# Altium PCB shy-mirror-sensor-revA.PcbDoc
Units mil, origin at the board's own origin, x right, y up, seen from the top; angles counter-clockwise.
Board outline 370 x 485 mil, 2 copper layers (Top Layer, Bottom Layer); 2 components, 5 nets, 14 pads, 2 vias.
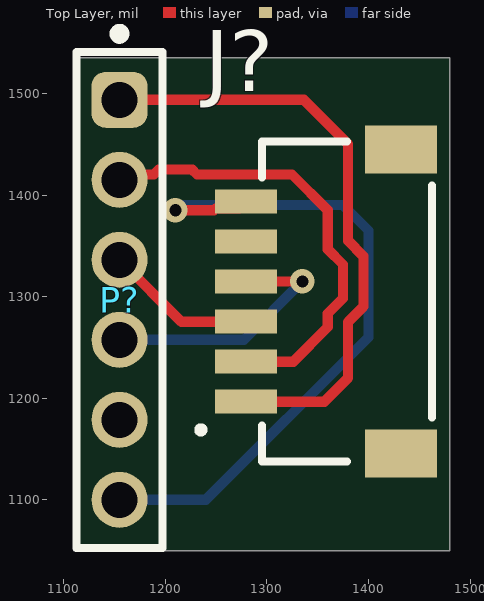
[diagram p0: Top Layer view]
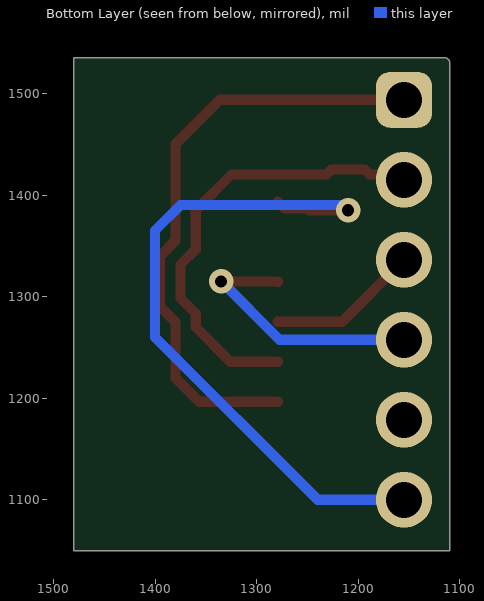
[diagram p1: Bottom Layer view, seen from below]

## Layer stack, top to bottom
Top Solder: solder mask 0.4, Solder Resist, Dk 3.5
Top Layer: signal copper 1.4
Dielectric 1: dielectric 12.6, FR-4, Dk 4.8
Bottom Layer: signal copper 1.4
Bottom Solder: solder mask 0.4, Solder Resist, Dk 3.5

## Board outline
1110,1050 1480,1050 1480,1535 1115,1535 ccw(c1115,1530) 1110,1530

## Design rules (kind name [scope] priority, off if disabled: settings)
Clearance [All] p1: gap=10 ignorepadtopadclearanceinfootprint=FALSE except(0: Arc-Hole Track-Hole SMDPad-Hole THPad-Hole Via-Hole Fill-Hole Poly-Hole Region-Hole Text-Hole)
PolygonConnect [All] p1: connectstyle=Relief reliefconductorwidth=10 reliefentries=4 polygonreliefangle="90 Angle" airgapwidth=10
RoutingVias [All] p1: holewidth=28 width=50 viastyle="Through Hole" minholewidth=12 minwidth=24 maxholewidth=28 maxwidth=50
SolderMaskExpansion [All] p1: expansion=4 istentingtop=FALSE
Width [All] p1: maxlimit=50 minlimit=10 preferedwidth=12 minimp=50.000000 maximp=50.000000 favimp=50.000000
30 further rules are at their usual default settings.

## Components (designator, comment, footprint, x,y, rotation, side; value= is the part's Value field where it differs from the comment)
J? "SM06B-SRSS-TB__LF__SN_" SM06B-SRSS-TB 1295,1295 r90 top
P? "62000611121" 62000611121 1155,1296.85 r270 top

## Footprints (in the part's own frame and the unit in brackets; to place one, negate y for a bottom-side part, rotate by r counter-clockwise, add the part's x,y. Pads: shape width x height; smd on the part's side, far side on the other; paste and mask are expansions set on the pad)
62000611121 [mm] "Pin Header, pitch 2.00 mm, THT, Vertical, single row, 6p"
  rrect50% 1.4x1.4 hole 0.9: 1(-5,0)
  round 1.4 hole 0.9: 2(-3,0) 3(-1,0) 4(1,0) 5(3,0) 6(5,0)
  silkscreen extent -6.77,-1.07 6.2,1.07, body extent -6,-1 6,1, height 6.05
SM06B-SRSS-TB [mm]
  rect 0.6x1.55 smd: 1(-2.5,0.4) 2(-1.5,0.4) 3(-0.5,0.4) 4(0.5,0.4) 5(1.5,0.4) 6(2.5,0.4)
  rect 1.2x1.8 smd: 7(3.8,-3.475) 8(-3.8,-3.475)
  silkscreen extent -4,-4.25 4,1.59, body extent -4,-4.18 4,0.77, height 2.96

## Part data
J?: "Connector", Manufacturer_Name="JST (JAPAN SOLDERLESS TERMINALS)", Manufacturer_Part_Number="SM06B-SRSS-TB (LF)(SN)", Datasheet Link=http://uk.rs-online.com/web/p/products/5468827
P?: "WR-PHD Pin Header, THT, Vertical, pitch 2mm, 1 Row, 6P", Contact Resistance=20mOhm, Manufacturer="Wurth Elektronik", Operating Temperature Max=105°C, Operating Temperature Min=-40°C, Rated Current=2A, Withstanding Voltage=500V, Working Voltage=200V, Category="Board-to-Board Connectors", ComponentLink1Description="Website Link", ComponentLink1URL=https://www.we-online.com/redexpert/article/62000611121?ad, ComponentLink2Description="Datasheet Link", ComponentLink2URL=https://www.we-online.com/redexpert/spec/62000611121?ad, Gender="Pin Header", Manufacturer Part Number=62000611121, Match Code=WR-PHD, Mount="Through Hole", Number of Pins=6, Number of Rows=1, Orientation=Vertical, Packaging=Bag, Pitch=2mm

## Via types
v1: diameter 24, hole 12, Top Layer to Bottom Layer, tented both sides, 2 vias

## Nets (pads, with @x,y where several pads share a name; then routed paths per layer and width w, separated by ;. In a path a pad name is that pad's centre, name@x,y a point inside that pad or via, vN(x,y) a via of type N, cw(c..) or ccw(c..) an arc to the next point about the centre after c; other vN are vias at no path point)
GND: J?.2 P?.2 | length 448
  Top Layer w10: P?.2 1160.28,1420.24 1188.67,1420.24 1193.43,1425 1226.57,1425 1231.33,1420.24 1324.76,1420.24 1360,1385 1360,1346.57 1375,1331.57 1375,1298.43 1360,1283.43 1360,1270 1325.94,1235.94 J?.2
SCL: J?.4 P?.4 | length 259.7
  Top Layer w10: J?.4 1279.41,1314.84 1334.84,1314.84 v1(1335,1315)
  Bottom Layer w10: P?.4 1277.48,1257.48 v1(1335,1315)
SDA: J?.3 P?.3 | length 149.5
  Top Layer w10: P?.3 1215.91,1275.32 J?.3
VIN: J?.1 P?.1 | length 596
  Top Layer w10: P?.1 1336.3,1493.7 1380,1450 1380,1354.85 1395,1339.85 1395,1290.15 1380,1275.15 1380,1220 1356.57,1196.57 J?.1
XSHT: J?.6 P?.6 | length 691.4
  Top Layer w10: v1(1210,1385) 1247.88,1385 1249.5,1386.61 1272.44,1386.61 J?.6
  Bottom Layer w10: P?.6 1240,1100 1400,1260 1400,1365 1375,1390 1215,1390 v1(1210,1385)
pads on no net: J?.5 J?.7 J?.8 P?.5

## Silkscreen, mask and mechanical layers (free items; w line width, h text height)
Mechanical 1:
  lines w10: 1095,1040 cw(c1100,1040) 1100,1045 1245,1045 cw(c1245,1040) 1250,1040 1250,935 ccw(c1300,935) 1300,885 1430,885 ccw(c1430,935) 1480,935 1480,1735 ccw(c1430,1735) 1430,1785 1285,1785 ccw(c1285,1735) 1235,1735 1235,1550 1095,1550 1095,1040
Board:
  the board outline again, w10